# EAGLE board Solar Tracker(without using ATmega328P) (EAGLE 9.6.0)
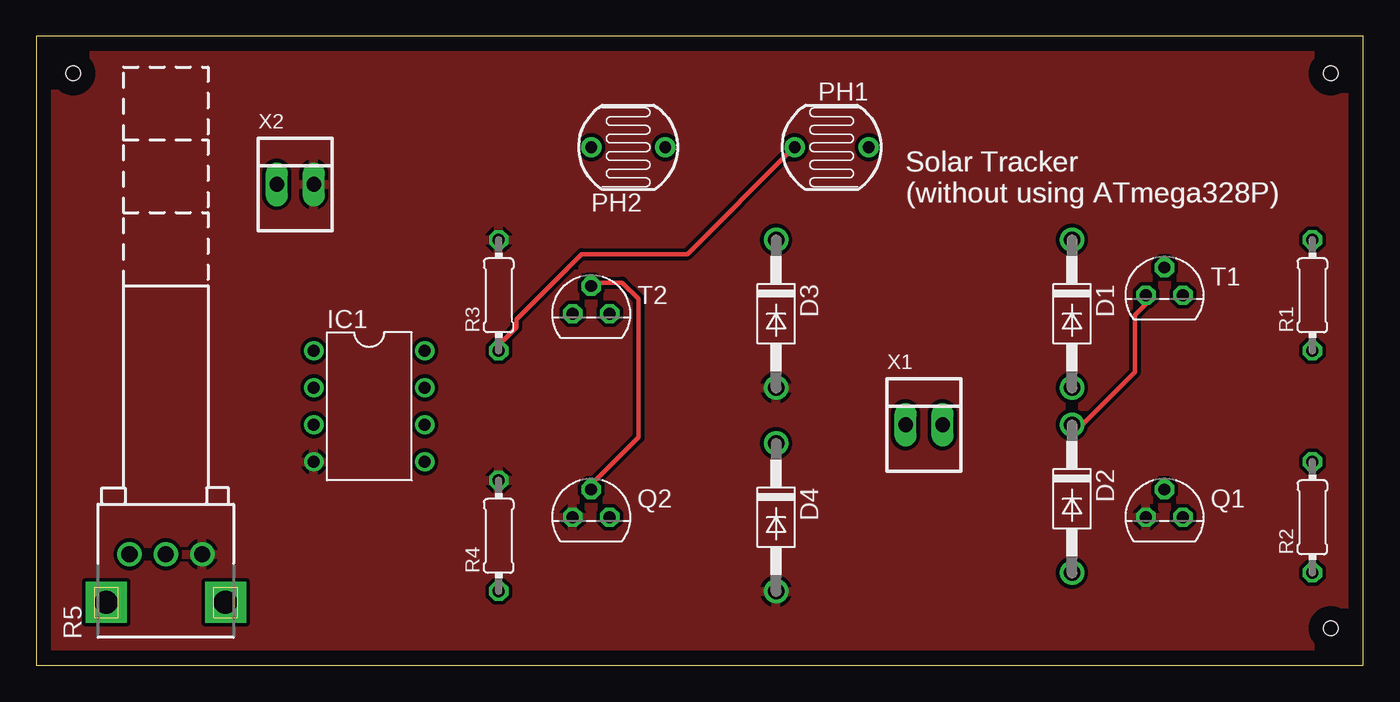
[diagram p0: board, top side]
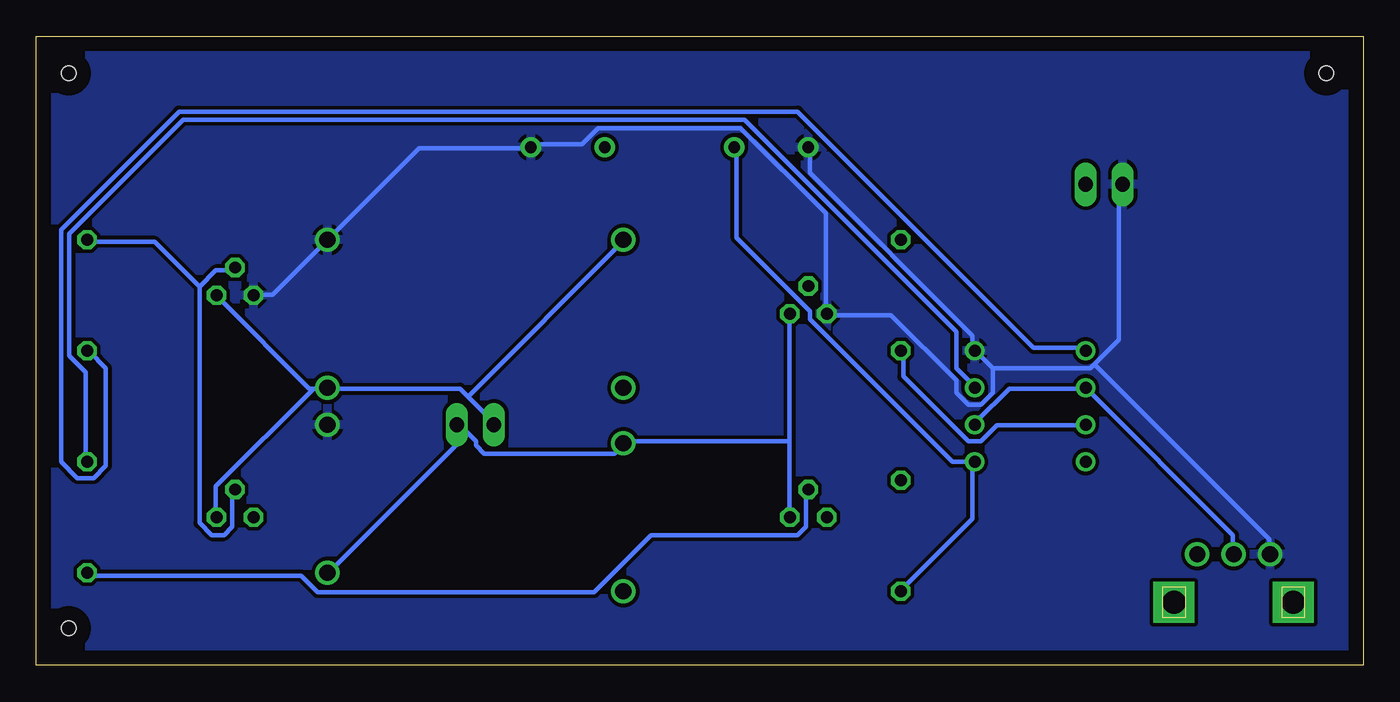
[diagram p1: board, bottom side, seen from below]

Size 91.11 x 43.17 mm. Coordinates in mm from the lower left corner, seen from the top.
Outline: 0,0 91.11,0 91.11,43.17 0,43.17 0,0
Copper layers (1*16): Top 0.035mm / dielectric 1.5mm / Bottom 0.035mm
Design rules "default": minimum track width 6mil, minimum drill 0.35mm, track to track 6mil, track to pad 6mil, pad to pad 6mil, via to via 6mil, smd to smd 6mil, copper to edge 40mil, drill to drill 6mil, minimum pad ring 10mil, minimum via ring 8mil, stop-mask expansion 4mil, vias tented up to drill 0mil, thermal gap 10mil
Net classes: 0 default: width 0.305 mm, drill 0.508 mm, clearance 0.254 mm
Holes 1 mm at 2.54,40.64 88.9,40.64 88.9,2.54

## Footprints (pad centres in the part's own frame; a part is rotated, then mirrored left to right if it is on the bottom)
DO41-10 = drill 1.118: A 5.08,0; C -5.08,0
DIL08 = drill 0.813 pad 1.27: 1 -3.81,-3.81; 2 -1.27,-3.81; 3 1.27,-3.81; 4 3.81,-3.81; 5 3.81,3.81; 6 1.27,3.81; 7 -1.27,3.81; 8 -3.81,3.81
VT800 = drill 0.8 pad 1.4: 1 -2.54,0; 2 2.54,0
TO92 = drill 0.813 octagon: 1 1.27,0; 2 0,1.905; 3 -1.27,0
0204/7 = drill 0.813 octagon: 1 -3.81,0; 2 3.81,0
EVUE = drill 1.1 pad 1.676: 1 0,-2.5; 2 0,0; 3 0,2.5 | drill 1.6 pad 2.8 square: M1 -3.3,4.1; M2 -3.3,-4.1
22-23-2021 = drill 1 long: 1 -1.27,0; 2 1.27,0

## Placement (x,y rotation side)
D1  1N4004  [DO41-10]  71.12,24.13 270 top
D2  1N4004  [DO41-10]  71.12,11.43 270 top
D3  1N4004  [DO41-10]  50.8,24.13 270 top
D4  1N4004  [DO41-10]  50.8,10.16 270 top
IC1  LM358N  [DIL08]  22.86,17.78 270 top
PH1  VT80N1  [VT800]  54.61,35.56 180 top
PH2  VT80N1  [VT800]  40.64,35.56 0 top
Q1  BC557  [TO92]  77.47,10.16 0 top
Q2  BC557  [TO92]  38.1,10.16 0 top
R1  [0204/7]  87.63,25.4 90 top
R2  [0204/7]  87.63,10.16 90 top
R3  [0204/7]  31.75,25.4 90 top
R4  [0204/7]  31.75,8.89 90 top
R5  EVUE30  [EVUE]  8.89,7.62 90 top
T1  BC547  [TO92]  77.47,25.4 0 top
T2  BC547  [TO92]  38.1,24.13 0 top
X1  22-23-2021  [22-23-2021]  60.96,16.51 0 top
X2  22-23-2021  [22-23-2021]  17.78,33.02 0 top

## Library data of the parts
D1-D4 = diode
IC1 = linear
PH1 PH2 = photo-elements
Q1 Q2 = transistor-pnp
R1-R4 = rcl; SPICEPREFIX: R
R5 = pot
T1 T2 = transistor
X1 X2 = con-molex; MF: MOLEX; MPN: 22-23-2021; OC_FARNELL: 1462926; OC_NEWARK: 25C3832

## Nets
GND: D3.A D4.A IC1.4 Q1.3 Q2.3 R3.2 R4.2 R5.1 X2.2
N$1: D1.A D3.C Q1.1 T1.1 X1.1
N$2: D2.A D4.C Q2.1 T2.1 X1.2
N$6: Q2.2 R2.1 T2.2
N$7: Q1.2 R1.2 T1.2
N$8: IC1.5 PH2.2 R4.1
N$9: IC1.7 R2.2
N$10: IC1.1 R1.1
N$11: IC1.3 PH1.2 R3.1
N$14: IC1.2 IC1.6 R5.2
VCC: D1.C D2.C IC1.8 PH1.1 PH2.1 R5.3 T1.3 T2.3 X2.1

## Tracks (layer width: path | path; a pad name or v marks a point on that pad's centre or on a via)
GND
  pour Top: -1.27,44.45 -1.27,-1.27 92.71,-1.27 92.71,44.45
N$1
  Bottom 0.305: 72.08,19 78.79,12.29 78.79,10.34 Q1.1 | 72.08,19 71.25,19 D1.A 70.97,19 62.03,19 61.47,18.44 | 72.08,19 72.36,19 78.51,25.15 T1.1 | 61.47,18.44 59.79,16.76 X1.1 | 61.47,18.44 50.85,29.06 D3.C
N$2
  Bottom 0.305: 39.4,15.37 39.4,24.03 T2.1 | 39.4,15.37 39.4,10.34 Q2.1 | 61.47,15.93 60.91,15.37 60.91,15.09 60.35,14.53 51.41,14.53 50.85,15.09 D4.C 50.57,15.37 39.4,15.37 | 61.47,15.93 62.03,16.48 X1.2 | 61.47,15.93 70.97,6.43 D2.A
N$6
  Top 0.305: Q2.2 38.28,12.29 38.28,12.57 41.35,15.65 41.35,25.15 40.23,26.26 38.28,26.26 T2.2
  Bottom 0.305: R2.1 87.45,6.15 72.92,6.15 71.81,5.03 52.81,5.03 48.9,8.94 38.84,8.94 38.28,9.5 38.28,12.01 Q2.2
N$7
  Bottom 0.305: 79.91,25.98 79.91,9.78 79.07,8.94 78.23,8.94 77.67,9.5 77.67,12.01 Q1.2 | 79.91,25.98 78.79,27.1 77.67,27.1 T1.2 | 79.91,25.98 82.98,29.06 87.45,29.06 R1.2
N$8
  Bottom 0.305: 26.82,13.97 26.82,10.06 31.57,5.31 R4.1 | 26.82,13.97 28.22,13.97 38,23.75 38,24.31 43.03,29.34 43.03,35.48 PH2.2 | 26.82,13.97 IC1.5
N$9
  Bottom 0.305: R2.2 87.73,13.97 87.73,20.12 88.85,21.23 88.85,29.62 81.03,37.44 42.47,37.44 27.94,22.91 27.94,20.4 26.82,19.28 IC1.7
N$10
  Bottom 0.305: IC1.1 19.28,21.79 22.63,21.79 38.84,38 81.31,38 89.41,29.9 89.41,13.97 88.29,12.85 87.17,12.85 86.33,13.69 86.33,20.4 87.45,21.51 R1.1
N$11
  Top 0.305: PH1.2 51.97,35.48 44.7,28.22 37.44,28.22 32.97,23.75 32.97,23.19 31.57,21.79 R3.1
  Bottom 0.305: IC1.3 19.28,16.48 25.15,16.48 26.26,15.37 27.1,15.37 31.57,19.84 31.57,21.51 R3.1
N$14
  Bottom 0.305: IC1.6 26.54,16.76 24.31,19 19.28,19 IC1.2 8.94,8.94 8.94,7.82 R5.2
VCC
  Top 0.305: D2.C 71.25,16.48 71.81,16.48 75.44,20.12 75.44,24.03 76.56,25.15 76.28,25.43 T1.3
  Bottom 0.305: T1.3 76,25.43 74.88,25.43 71.25,29.06 D1.C 70.97,29.34 64.82,35.48 57.28,35.48 PH1.1 57,35.76 53.65,35.76 52.53,36.88 42.75,36.88 36.88,31.01 36.88,24.31 T2.3 36.6,24.03 32.41,24.03 27.94,19.56 27.94,18.72 27.1,17.88 26.26,17.88 25.43,18.72 25.43,20.4 | PH2.1 38,35.48 38,33.81 26.82,22.63 26.82,21.79 IC1.8 26.54,21.51 25.43,20.4 | 18.44,20.68 18.72,20.4 25.43,20.4 | 18.44,20.68 16.76,22.35 16.76,32.97 X2.1 | 18.44,20.68 6.43,8.66 6.43,7.82 R5.3
  pour Bottom: -1.27,43.18 -1.27,-1.27 92.71,-1.27 92.71,44.45 -1.27,44.45

## Text on the board
tPlace: Solar Tracker / (without using ATmega328P) | Solar Tracker / (without using ATmega328P)